# Altium PCB EA3059.PcbDoc
Units mil, origin at the board's own origin, x right, y up, seen from the top; angles counter-clockwise.
Board outline 560 x 568 mil, 4 copper layers (Top Layer, PWR, GND, Bottom Layer), stack 23.756 mil thick; 42 components, 18 nets, 99 pads, 43 vias.
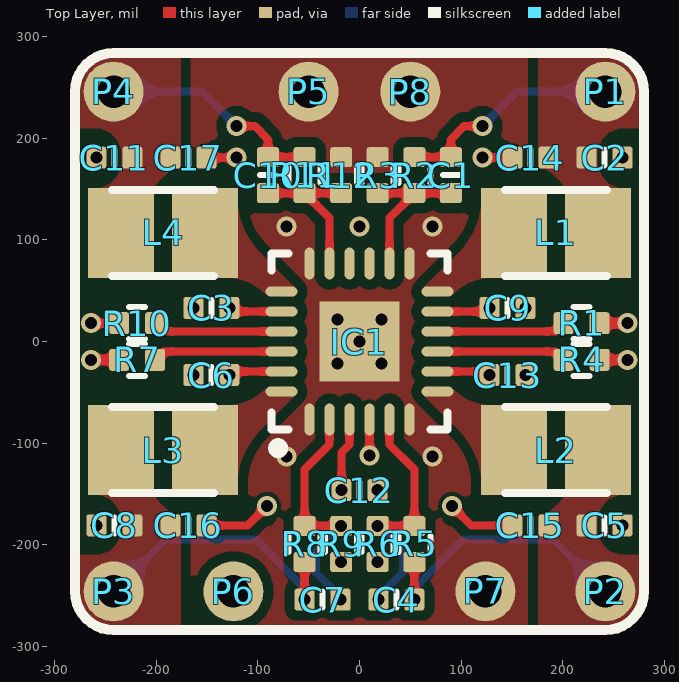
[diagram p0: Top Layer view]
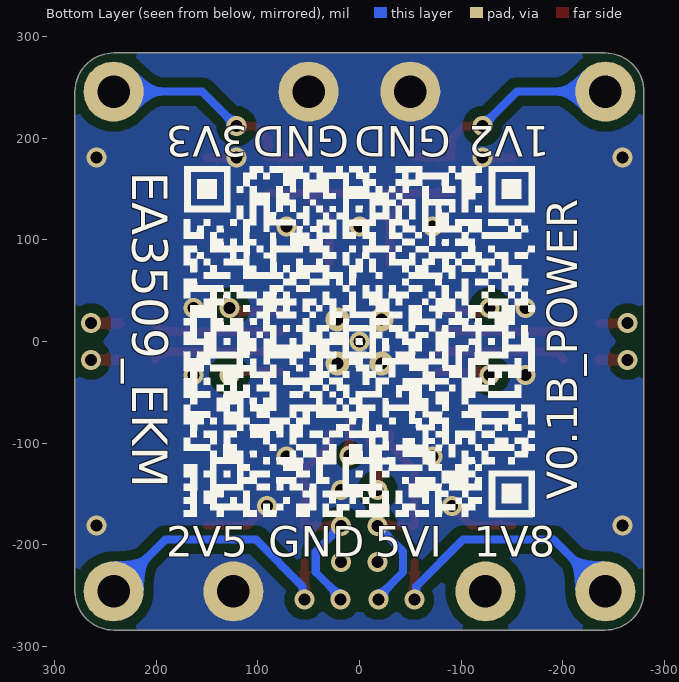
[diagram p1: Bottom Layer view, seen from below]
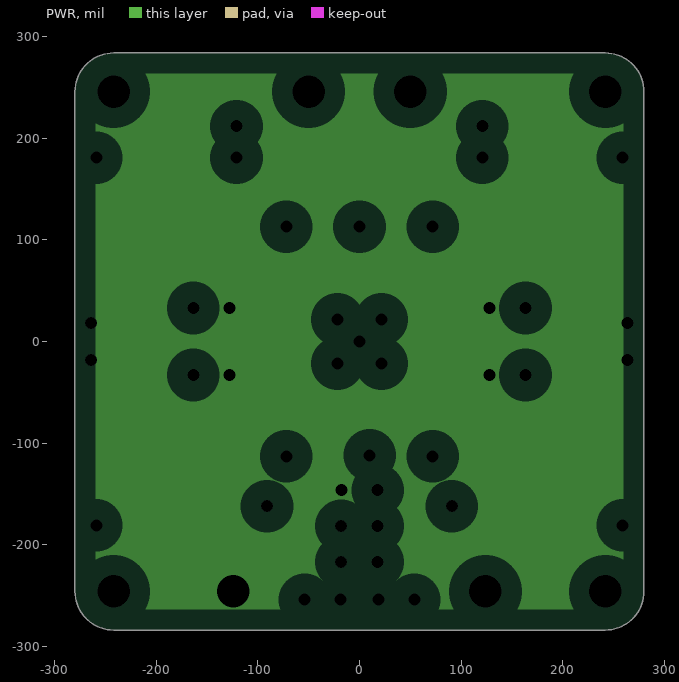
[diagram p2: PWR, clearances drawn from the general rule]
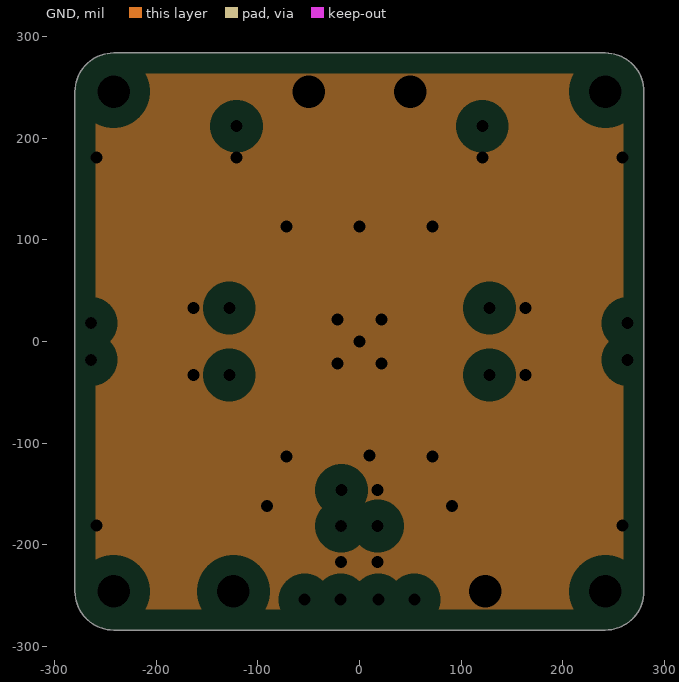
[diagram p3: GND, clearances drawn from the general rule]
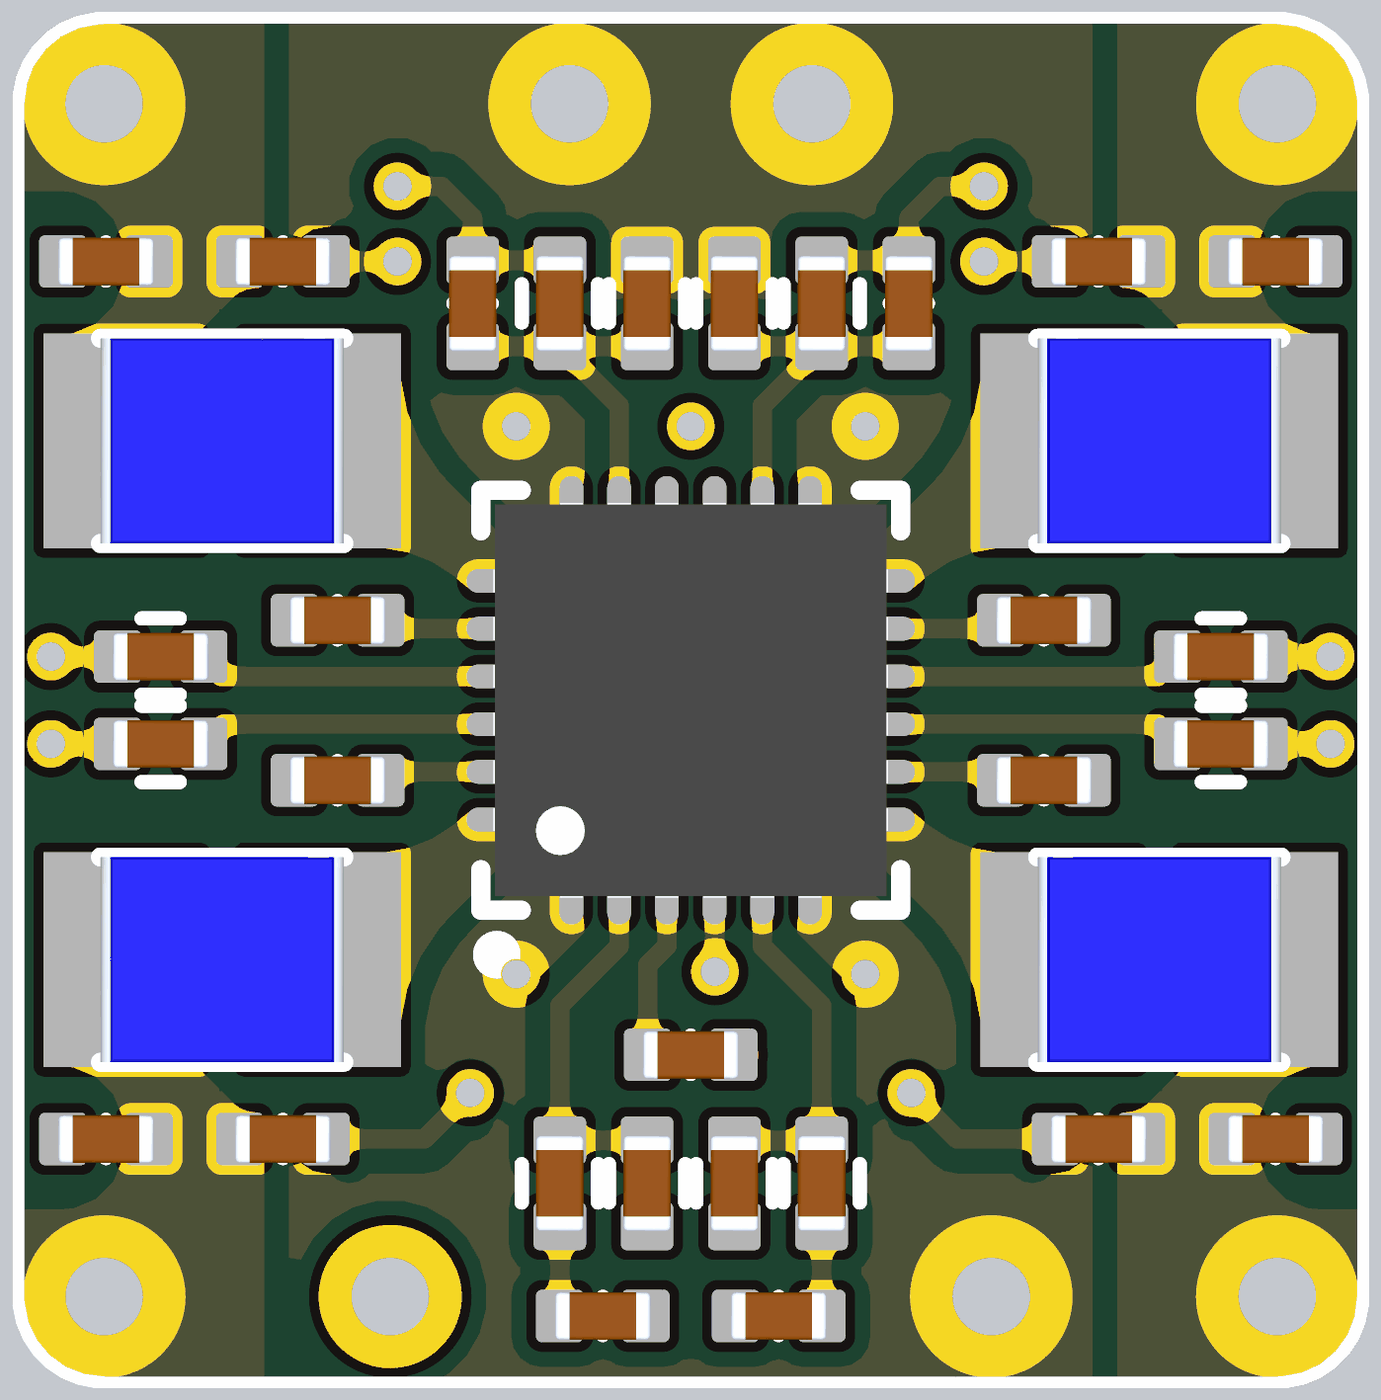
[diagram p4: 3D render of the assembled board from above, using the file's embedded part models]

## Layer stack, top to bottom
Top Solder: solder mask 0.4, Solder Resist, Dk 3.5
Top Layer: signal copper 1.4
Dielectric 2: prepreg 2.8, PP-006, Dk 4.1
PWR: plane copper 1.378, net VCC_5V
Dielectric 1: dielectric 12.6, FR-4, Dk 4.8
GND: plane copper 1.378, net GND
Dielectric 3: prepreg 2.8, PP-006, Dk 4.1
Bottom Layer: signal copper 1.4
Bottom Solder: solder mask 0.4, Solder Resist, Dk 3.5

## Board outline
-280,-246.04 ccw(c-242.04,-246.04) -242.04,-284 242.04,-284 ccw(c242.04,-246.04) 280,-246.04 280,246.04 ccw(c242.04,246.04) 242.04,284 -242.04,284 ccw(c-242.04,246.04) -280,246.04

## Design rules (kind name [scope] priority, off if disabled: settings)
Clearance [All] p1: gap=10 ignorepadtopadclearanceinfootprint=FALSE except(0: Arc-SMDPad Arc-Hole Track-SMDPad Track-Hole SMDPad-SMDPad SMDPad-Via SMDPad-Hole THPad-Hole Via-Via Via-Hole Fill-Hole Poly-Hole Region-Hole Text-Hole)
PlaneClearance [All] p1: clearance=20
PlaneConnect [All] p1: planeconnectstyle=Direct reliefexpansion=20 reliefentries=4 reliefconductorwidth=10 reliefairgap=10
PolygonConnect [All] p1: connectstyle=Direct reliefconductorwidth=10 reliefentries=4 polygonreliefangle="90 Angle" airgapwidth=10
RoutingVias [All] p1: holewidth=11.81 width=19.68 viastyle="Through Hole" minholewidth=11.81 minwidth=19.68 maxholewidth=11.81 maxwidth=19.68
SolderMaskExpansion [All] p1: expansion=4 istentingtop=FALSE
Width [All] p1: maxlimit=50 minlimit=8 preferedwidth=8
28 further rules are at their usual default settings.

## Components (designator, comment, footprint, x,y, rotation, side; value= is the part's Value field where it differs from the comment)
C1 "220pF/50V" CAP-0402 90,163.72 r90 top
C2 "22uF/6.3V" CAP-0402 241.28,181 r180 top
C3 "10uF/10V" CAP-0402 -145.72,33 r0 top
C4 "220pF/50V" CAP-0402 36.28,-254 r0 top
C5 "22uF/6.3V" CAP-0402 241.28,-181 r180 top
C6 "10uF/10V" CAP-0402 -145.72,-33 r0 top
C7 "220pF/50V" CAP-0402 -36.28,-254 r180 top
C8 "22uF/6.3V" CAP-0402 -241.28,-181 r0 top
C9 "10uF/10V" CAP-0402 145.72,33 r180 top
C10 "220pF/50V" CAP-0402 -90,163.72 r90 top
C11 "22uF/6.3V" CAP-0402 -241.28,181 r0 top
C12 "1uF/10V" CAP-0402 0,-146.28 r180 top
C13 "10uF/10V" CAP-0402 145.72,-33 r180 top
C14 "1uF/10V" CAP-0402 168.28,181 r0 top
C15 "1uF/10V" CAP-0402 168.28,-181 r0 top
C16 "1uF/10V" CAP-0402 -168.28,-181 r180 top
C17 "1uF/10V" CAP-0402 -168.28,181 r180 top
IC1 "EA3059" QFN-24-4x4 0,0 r90 top locked
L1 "2.2uH" L-1008 193.34,107 r0 top
L2 "2.2uH" L-1008 193.34,-107 r0 top
L3 "2.2uH" L-1008 -193.34,-107 r180 top
L4 "2.2uH" L-1008 -193.34,107 r180 top
P1 "HDR1x2_2.54" HDR1X1_2.54 242.04,246.04 r0 top
P2 "HDR1x2_2.54" HDR1X1_2.54 242,-246 r0 top
P3 "HDR1x2_2.54" HDR1X1_2.54 -242,-246 r0 top
P4 "HDR1x2_2.54" HDR1X1_2.54 -242.04,246.04 r0 top
P5 "HDR1x2_2.54" HDR1X1_2.54 -50,246.04 r0 top
P6 "HDR1x2_2.54" HDR1X1_2.54 -124,-246 r0 top
P7 "HDR1x2_2.54" HDR1X1_2.54 124,-246 r0 top
P8 "HDR1x2_2.54" HDR1X1_2.54 50,246.04 r0 top
R1 "10k" R-0402 218.72,18 r0 top
R2 "510k" R-0402 54,163.72 r90 top
R3 "110k" R-0402 18,163.72 r270 top
R4 "10k" R-0402 218.72,-18 r0 top
R5 "316k" R-0402 54,-199.28 r270 top
R6 "100k" R-0402 18,-199.28 r90 top
R7 "10k" R-0402 -218.72,-18 r180 top
R8 "200k" R-0402 -54,-199.28 r270 top
R9 "100k" R-0402 -18,-199.28 r90 top
R10 "10k" R-0402 -218.72,18 r180 top
R11 "100k" R-0402 -54,163.72 r90 top
R12 "100k" R-0402 -18,163.72 r270 top

## Footprints (in the part's own frame and the unit in brackets; to place one, negate y for a bottom-side part, rotate by r counter-clockwise, add the part's x,y. Pads: shape width x height; smd on the part's side, far side on the other; paste and mask are expansions set on the pad)
CAP-0402 [mm]
  rrect25% 0.5x0.55 smd: 1(-0.45,0) 2(0.45,0)
  silkscreen extent 0,-0.2 0,0.2, body extent -0.5,-0.25 0.5,0.25, height 0.6
HDR1X1_2.54 [mm]
  round 1.5 hole 0.813: 1(0,0)
L-1008 [mm]
  rect 1.65x2.25 smd: 1(-1.05,0) 2(1.05,0)
  silkscreen extent -1.28,-1.07 1.28,1.07, body extent -1.28,-1.07 1.28,1.07, height 1.2
QFN-24-4x4 [mm] "QFN, 24-Leads, Body 4.00x4.00mm, Pitch 0.50mm, Thermal Pad 2.70x2.60mm, IPC Medium Density"
  oval 0.8x0.25 smd: 1(-1.95,1.25) 2(-1.95,0.75) 3(-1.95,0.25) 4(-1.95,-0.25) 5(-1.95,-0.75) 6(-1.95,-1.25) 13(1.95,-1.25) 14(1.95,-0.75) 15(1.95,-0.25) 16(1.95,0.25) 17(1.95,0.75) 18(1.95,1.25)
  oval 0.25x0.8 smd: 7(-1.25,-1.95) 8(-0.75,-1.95) 9(-0.25,-1.95) 10(0.25,-1.95) 11(0.75,-1.95) 12(1.25,-1.95) 19(1.25,1.95) 20(0.75,1.95) 21(0.25,1.95) 22(-0.25,1.95) 23(-0.75,1.95) 24(-1.25,1.95)
  rect 2x2 smd: 25(0,0)
  silkscreen extent -2.79,-2.2 2.2,2.2, body extent -2.07,-2.07 2.07,2.07, height 0.9
R-0402 [mm]
  rrect25% 0.5x0.55 smd: 1(-0.45,0) 2(0.45,0)
  silkscreen extent -0.2,-0.4 0.2,0.4, body extent -0.5,-0.25 0.5,0.25, height 0.6

## Part data
C1 C4 C7 C10: library part CAP, "CC0402JRNPO9BN221(±5%)", Package=0402, SuppliersPartNumber=C52923, ComponentLink1Description=供应商链接, ComponentLink1URL=http://www.szlcsc.com/product/details_53938.html, Supplier=LC
C2 C5 C8 C11: library part CAP, "GRM155R60J226ME11D(±20%)", Package=0402, SuppliersPartNumber=C52923, ComponentLink1Description=供应商链接, ComponentLink1URL=http://www.szlcsc.com/product/details_53938.html, Supplier=LC
C3 C6 C9 C13: library part CAP, "CC0402MRX5R6BB106(±20%)", Package=0402, SuppliersPartNumber=C52923, ComponentLink1Description=供应商链接, ComponentLink1URL=http://www.szlcsc.com/product/details_53938.html, Supplier=LC
C12 C14 C15 C16 C17: library part CAP, "CC0402KRX5R6BB105(±10%)", Package=0402, SuppliersPartNumber=C52923, ComponentLink1Description=供应商链接, ComponentLink1URL=http://www.szlcsc.com/product/details_53938.html, Supplier=LC
IC1: "4CH PMIC"
L1 L2 L3 L4: library part INDUCTOR, "SRN2512-2R2M", Package=0402, SuppliersPartNumber=C32041, ComponentLink1Description=供应商链接, ComponentLink1URL=http://www.szlcsc.com/product/details_33003.html, Supplier=LC
P1 P2 P3 P4 P5 P6 P7 P8: library part HDR1x1_2.54, "Header"
R1 R4 R7 R10: library part RES, "RC0402FR-0710KL", Package=0805, SuppliersPartNumber=C17798, Supplier=LC
R2: library part RES, "RC0402FR-07510KL", Package=0805, SuppliersPartNumber=C17798, Supplier=LC
R3: library part RES, "AC0402FR-07110KL", Package=0805, SuppliersPartNumber=C17798, Supplier=LC
R5: library part RES, "RC0402FR-07316KL", Package=0805, SuppliersPartNumber=C17798, Supplier=LC
R6 R9 R11 R12: library part RES, "RC0402FR-07100KL", Package=0805, SuppliersPartNumber=C17798, Supplier=LC
R8: library part RES, "RC0402FR-07200KL", Package=0805, SuppliersPartNumber=C17798, Supplier=LC

## Via types
v1: diameter 19.68, hole 11.81, Top Layer to Bottom Layer, 39 vias
v2: diameter 23.86, hole 11.81, Top Layer to Bottom Layer, 4 vias

## Nets (pads, with @x,y where several pads share a name; then routed paths per layer and width w, separated by ;. In a path a pad name is that pad's centre, name@x,y a point inside that pad or via, vN(x,y) a via of type N, cw(c..) or ccw(c..) an arc to the next point about the centre after c; other vN are vias at no path point)
EN1: IC1.10 R1.1 | length 128.2
  Top Layer w8: IC1.10 192.84,9.84 194.17,11.17 195.16,11.17 201,17.02 R1.1
EN2: IC1.9 R4.1 | length 128.2
  Top Layer w8: IC1.9 192.84,-9.84 194.17,-11.17 195.16,-11.17 201,-17.02 R4.1
EN3: IC1.22 R7.1 | length 128.2
  Top Layer w8: R7.1 -201,-17.02 -195.16,-11.17 -194.17,-11.17 -192.84,-9.84 IC1.22
EN4: IC1.21 R10.1 | length 128.2
  Top Layer w8: R10.1 -201,17.02 -193.83,9.84 IC1.21
GND: C2.1 C3.1 C5.1 C6.1 C8.1 C9.1 C11.1 C12.1 C13.1 C14.1 C15.1 C16.1 C17.1 IC1.1 IC1.4 IC1.6 IC1.13 IC1.18 IC1.25 P5.1 P7.1 P8.1 R3.1 R6.1 R9.1 R12.1 | length 229.6
  Top Layer w8: C16.1 -110,-181 v1(-91,-162) ; C17.1 v1(-121,181) ; IC1.4 9.92,-76.85 9.92,-111.92 v1(10,-112) ; C12.1 v1(18,-146.28) ; v1(91,-162) 110,-181 C15.1 ; v1(121,181) C14.1
  other v1: -18,-217 18,-217 -259,-181 259,-181 -72,-113 72,-113 -163.43,-33 163.43,-33 0,0 -163.43,33 163.43,33 -72,113 0,113 72,113 -259,181 259,181
  other v2: -21.65,-21.65 21.65,-21.65 -21.65,21.65 21.65,21.65
NetC1_1: C1.1 IC1.14 R2.1 R3.2 | length 151.9
  Top Layer w8: R3.2 R2.1 ; IC1.14 29.53,121.53 47.17,139.17 47.17,140.16 53.02,146 R2.1 ; C1.1 R2.1
NetC4_1: C4.1 IC1.5 R5.1 R6.2 | length 230.5
  Top Layer w8: R6.2@18.08,-181.65 54.08,-181.65 54.08,-126.08 29.61,-101.61 IC1.5@29.61,-90.13
  Bottom Layer w8: v1(18,-181.57) 42.98,-206.61 42.98,-227.1 18.57,-251.51 v1(18.57,-254)
NetC7_1: C7.1 IC1.2 R8.1 R9.2 | length 230.5
  Top Layer w8: IC1.2@-29.53,-90.06 -29.53,-101.53 -54,-126 R8.1 v1(-18,-181.57)
  Bottom Layer w8: v1(-18.57,-254) -18.57,-251.51 -42.98,-227.1 -42.98,-206.61 v1(-18,-181.57)
NetC10_1: C10.1 IC1.17 R11.1 R12.2 | length 151.9
  Top Layer w8: C10.1 R11.1 ; IC1.17 -29.53,121.53 -47.17,139.17 -47.17,140.16 -53.02,146 R11.1 ; R12.2 R11.1
NetIC1_7: IC1.7 L2.1
NetIC1_12: IC1.12 L1.1
NetIC1_19: IC1.19 L4.1
NetIC1_24: IC1.24 L3.1
VCC_1V2: C10.2 C11.2 C17.2 L4.2 P4.1 R11.2 | length 263.1
  Top Layer w8: v1(-121,212) -103,212 -90,199 C10.2 ; C10.2 R11.2 -90.98,181.43 C10.2
  Bottom Layer w8: P4.1 -155.04,246.04 v1(-121,212)
VCC_1V8: C7.2 C8.2 C16.2 L3.2 P3.1 R8.2 | length 277
  Top Layer w8: v1(-54,-254) R8.2
  Bottom Layer w8: P3.1 -191,-195 -102,-195 -55.94,-241.06 -55.94,-252.06 v1(-54,-254)
VCC_2V5: C4.2 C5.2 C15.2 L2.2 P2.1 R5.2 | length 277
  Top Layer w8: v1(54,-254) R5.2
  Bottom Layer w8: v1(54,-254) 55.94,-252.06 55.94,-241.06 102,-195 191,-195 P2.1
VCC_3V3: C1.2 C2.2 C14.2 L1.2 P1.1 R2.2 | length 240.7
  Top Layer w8: R2.2 C1.2@90.98,181.43 ; C1.2 90,199 103,212 v1(121,212) ; P1.1@229.15,225.58 241.22,225.58 P1.1@243.04,223.75
  Bottom Layer w8: v1(121,212) 155.04,246.04 P1.1
VCC_5V: C3.2 C6.2 C9.2 C12.2 C13.2 IC1.3 IC1.8 IC1.11 IC1.20 IC1.23 P6.1 R1.2 R4.2 R7.2 R10.2 | length 368.7
  Top Layer w8: v1(-264,18) R10.2 ; v1(-128,33) -124.53,29.53 IC1.20 ; C6.2@-124.53,-29.53 IC1.23 ; v1(-17.72,-146.28) -17.72,-109.25 -9.84,-101.38 IC1.3@-9.84,-90.06 ; IC1.8 C13.2@124.53,-29.53 ; IC1.11 C9.2@124.53,29.53
  Top Layer w10: v1(-264,-18) R7.2 ; R4.2 v1(264,-18) ; R1.2 v1(264,18)
  Bottom Layer w10: P6.1@-124,-249 P6.1
  other v1: -128,-33 128,-33 128,33
pads on no net: IC1.15 IC1.16
copper on no net: | length 0

## Polygon pours and split planes (outlines as drawn)
VCC_3V3 on Top Layer "NONET_L01_P-001" (solid, pour order 27): 260,210 280,210 280,230 280,248.3 ccw(c244.3,248.3) 244.3,284 176,284 176,173 ccw(c179,173) 179,170 cw(c179,155.52) 189.24,165.76 200.15,154.85 cw(c194.35,149.05) 202.55,149.05 202.55,142 267,142 267,151 259.75,151 cw(c259.75,176.75) 234,176.75 234,184.5 cw(c259.5,184.5) 259.5,210 259.97,210 ccw(c259.98,210.36)
VCC_1V2 on Top Layer "NONET_L01_P-001" (solid, pour order 26): -260,210 -280,210 -280,230 -280,248.3 cw(c-244.3,248.3) -244.3,284 -176,284 -176,173 cw(c-179,173) -179,170 ccw(c-179,155.52) -189.24,165.76 -200.15,154.85 ccw(c-194.35,149.05) -202.55,149.05 -202.55,142 -267,142 -267,151 -259.75,151 ccw(c-259.75,176.75) -234,176.75 -234,184.5 ccw(c-259.5,184.5) -259.5,210 -259.97,210 cw(c-259.98,210.36)
VCC_1V8 on Top Layer "NONET_L01_P-001" (solid, pour order 24): -260,-210 -280,-210 -280,-230 -280,-248.3 ccw(c-244.3,-248.3) -244.3,-284 -176,-284 -176,-173 ccw(c-179,-173) -179,-170 cw(c-179,-155.52) -189.24,-165.76 -200.15,-154.85 cw(c-194.35,-149.05) -202.55,-149.05 -202.55,-142 -267,-142 -267,-151 -259.75,-151 cw(c-259.75,-176.75) -234,-176.75 -234,-184.5 cw(c-259.5,-184.5) -259.5,-210 -259.97,-210 ccw(c-259.98,-210.36)
VCC_2V5 on Top Layer "NONET_L01_P-001" (solid, pour order 12): 260,-210 280,-210 280,-230 280,-248.3 cw(c244.3,-248.3) 244.3,-284 176,-284 176,-173 cw(c179,-173) 179,-170 ccw(c179,-155.52) 189.24,-165.76 200.15,-154.85 ccw(c194.35,-149.05) 202.55,-149.05 202.55,-142 267,-142 267,-151 259.75,-151 ccw(c259.75,-176.75) 234,-176.75 234,-184.5 ccw(c259.5,-184.5) 259.5,-210 259.97,-210 cw(c259.98,-210.36)
GND on Top Layer "NONET_L01_P-001" (solid, pour order 28): -280,-248.3 ccw(c-244.3,-248.3) -244.3,-284 244.3,-284 ccw(c244.3,-248.3) 280,-248.3 280,-199 280,248.3 ccw(c244.3,248.3) 244.3,284 -244.3,284 ccw(c-244.3,248.3) -280,248.3 -280,199
NetIC1_19 on Top Layer "NONET_L01_P-001" (solid, pour order 3): -94,48 ccw(c-131.19,9.44) -132.16,63 -135,63 -135,149 -120,149 -120,139.7 ccw(c-48.3,139.7) -99,89 -63,53 -65,44 -90.8,45.53
NetIC1_12 on Top Layer "NONET_L01_P-001" (solid, pour order 2): 94,48 cw(c131.19,9.44) 132.16,63 135,63 135,149 120,149 120,139.7 cw(c48.3,139.7) 99,89 63,53 65,44 90.8,45.53
NetIC1_7 on Top Layer "NONET_L01_P-001" (solid, pour order 1): 94,-48 ccw(c131.19,-9.44) 132.16,-63 135,-63 135,-149 120,-149 120,-139.7 ccw(c48.3,-139.7) 99,-89 63,-53 65,-44 90.8,-45.53
NetIC1_24 on Top Layer "NONET_L01_P-001" (solid, pour order 0): -94,-48 cw(c-131.19,-9.44) -132.16,-63 -135,-63 -135,-149 -120,-149 -120,-139.7 cw(c-48.3,-139.7) -99,-89 -63,-53 -65,-44 -90.8,-45.53
GND on Bottom Layer "NONET_L01_P-001" (solid, pour order 29): -280,-248.3 ccw(c-244.3,-248.3) -244.3,-284 244.3,-284 ccw(c244.3,-248.3) 280,-248.3 280,-199 280,248.3 ccw(c244.3,248.3) 244.3,284 -244.3,284 ccw(c-244.3,248.3) -280,248.3 -280,199
GND on GND (split plane): 245.54,263.64 248.91,262.62 252.01,260.96 254.73,258.73 256.96,256.01 258.62,252.91 259.64,249.54 259.94,246.46 259.9,246.04 259.9,-246.04 259.94,-246.46 259.64,-249.54 258.62,-252.91 256.96,-256.01 254.73,-258.73 252.01,-260.96 248.91,-262.62 245.54,-263.64 242.46,-263.94 242.04,-263.9 -242.04,-263.9 -242.46,-263.94 -245.54,-263.64 -248.91,-262.62 -252.01,-260.96 -254.73,-258.73 -256.96,-256.01 -258.62,-252.91 -259.64,-249.54 -259.94,-246.46 -259.9,-246.04 -259.9,246.04 -259.94,246.46 -259.64,249.54 -258.62,252.91 -256.96,256.01 -254.73,258.73 -252.01,260.96 -248.91,262.62 -245.54,263.64 -242.46,263.94 -242.04,263.9 242.04,263.9 242.46,263.94
VCC_5V on PWR (split plane): 245.54,263.64 248.91,262.62 252.01,260.96 254.73,258.73 256.96,256.01 258.62,252.91 259.64,249.54 259.94,246.46 259.9,246.04 259.9,-246.04 259.94,-246.46 259.64,-249.54 258.62,-252.91 256.96,-256.01 254.73,-258.73 252.01,-260.96 248.91,-262.62 245.54,-263.64 242.46,-263.94 242.04,-263.9 -242.04,-263.9 -242.46,-263.94 -245.54,-263.64 -248.91,-262.62 -252.01,-260.96 -254.73,-258.73 -256.96,-256.01 -258.62,-252.91 -259.64,-249.54 -259.94,-246.46 -259.9,-246.04 -259.9,246.04 -259.94,246.46 -259.64,249.54 -258.62,252.91 -256.96,256.01 -254.73,258.73 -252.01,260.96 -248.91,262.62 -245.54,263.64 -242.46,263.94 -242.04,263.9 242.04,263.9 242.46,263.94

## Other copper
Top Layer:
  pour cut-out: 19.13,-66.13 ccw(c10,-66.13) 10,-57 ccw(c10,-66) 1,-66 1.13,-71 1.13,-97.93 cw(c-5.7,-97.93) -0.87,-102.76 -4.18,-106.07 -4.18,-111.76 ccw(c9.83,-111.76) 9.83,-125.76 11.13,-125.76 ccw(c11.13,-112.76) 24.13,-112.76 24.13,-105.76 20.13,-101.76 cw(c22.54,-99.34) 19.13,-99.34
Bottom Layer:
  pour cut-out: 24.1,-111.9 cw(c10.1,-111.9) 10.1,-125.9 cw(c10.1,-111.9) -3.9,-111.9 cw(c10.1,-111.9) 10.1,-97.9 cw(c10.1,-111.9)

## Silkscreen, mask and mechanical layers (free items; w line width, h text height)
Top Overlay:
  lines w10: -280,-246.04 ccw(c-242.04,-246.04) -242.04,-284 -108.31,-284 108.31,-284 242.04,-284 ccw(c242.04,-246.04) 280,-246.04 280,246.04 ccw(c242.04,246.04) 242.04,284 -242.04,284 ccw(c-242.04,246.04) -280,246.04 -280,-246.04
Bottom Overlay:
  drawing of 57 lines, arcs and shapes, not listed
  text "1V2" at -187.49,212 h30 r180
  text "GND" at -89.99,212 h30 r180
  text "GND" at 10.01,212 h30 r180
  text "3V3" at 110.01,212 h30 r180
  text "EA3509_EKM" at 223.58,167.11 h35 r90
  text "V0.1B_POWER" at -214.5,-155.95 h30 r270
  text "1V8" at -112.51,-212 h30
  text "5VI" at -15.01,-212 h30
  text "GND" at 89.99,-212 h30
  text "2V5" at 189.99,-212 h30
Mechanical 1:
  lines w5: -280,-246.04 ccw(c-242.04,-246.04) -242.04,-284 -108.31,-284 108.31,-284 242.04,-284 ccw(c242.04,-246.04) 280,-246.04 280,246.04 ccw(c242.04,246.04) 242.04,284 -242.04,284 ccw(c-242.04,246.04) -280,246.04 -280,-246.04